# EAGLE board project (EAGLE 9.1.3)

Size 254.79 x 203.25 mm. Coordinates in mm from the lower left corner, seen from the top.
Outline: 154.79,0 254.79,0 254.79,80 154.79,80 154.79,0
Copper layers (1*16): Top 0.035mm / dielectric 1.5mm / Bottom 0.035mm
Design rules "default": minimum track width 6mil, minimum drill 0.35mm, track to track 6mil, track to pad 6mil, pad to pad 6mil, via to via 6mil, smd to smd 6mil, copper to edge 40mil, drill to drill 6mil, minimum pad ring 10mil, minimum via ring 8mil, stop-mask expansion 4mil, vias tented up to drill 0mil, thermal gap 10mil

## Footprints (pad centres in the part's own frame; a part is rotated, then mirrored left to right if it is on the bottom)
TP_3535 = smd 0.889 x 0.889: T 0,0
UNO_R3_SHIELD = drill 1.016 pad 1.88: 3.3V 24.13,-2.54; 5V 24.13,0; A0 24.13,12.7; A1 24.13,15.24; A2 24.13,17.78; A3 24.13,20.32; A4 24.13,22.86; A5 24.13,25.4; AREF -24.13,-13.97; D2 -24.13,20.32; D3 -24.13,17.78; D4 -24.13,15.24; D5 -24.13,12.7; D6 -24.13,10.16; D7 -24.13,7.62; D8 -24.13,3.81; D9 -24.13,1.27; D10 -24.13,-1.27; D11 -24.13,-3.81; D12 -24.13,-6.35; D13 -24.13,-8.89; GND@0 24.13,2.54; GND@1 24.13,5.08; GND@2 -24.13,-11.43; IOREF 24.13,-7.62; NC 24.13,-10.16; RES 24.13,-5.08; RX -24.13,25.4; SCL -24.13,-19.05; SDA -24.13,-16.51; TX -24.13,22.86; VIN 24.13,7.62
ARDUINO_R3 = drill 1.016 pad 1.93: 3.3V 2.54,-24.13; 5V 5.08,-24.13; A0 17.78,-24.13; A1 20.32,-24.13; A2 22.86,-24.13; A3 25.4,-24.13; A4 27.94,-24.13; A5 30.48,-24.13; AREF -9.144,24.13; D0 30.48,24.13; D1 27.94,24.13; D2 25.4,24.13; D3 22.86,24.13; D4 20.32,24.13; D5 17.78,24.13; D6 15.24,24.13; D7 12.7,24.13; D8 8.636,24.13; D9 6.096,24.13; D10 3.556,24.13; D11 1.016,24.13; D12 -1.524,24.13; D13 -4.064,24.13; GND@1 7.62,-24.13; GND@2 10.16,-24.13; GND@3 -6.604,24.13; GND@4 33.16,-1.32; IOREF -2.54,-24.13; MISO 30.62,3.76; MOSI 33.16,1.22; NC -5.08,-24.13; RESET@1 0,-24.13; RESET@2 30.62,-1.32; SCK 30.62,1.22; SCL -14.224,24.13; SDA -11.684,24.13; VCC 33.16,3.76; VIN 12.7,-24.13 | hole 3.175: -17.78,24.13; 33.02,8.89; 33.02,-19.05; -19.05,-24.13
0805 = smd 1.016 x 1.397: 1 -0.889,0; 2 0.889,0
0402 = smd 0.635 x 0.635: 1 -0.445,0; 2 0.445,0
AVX-A = smd 1.27 x 1.27: + -1.27,0; - 1.27,0
SOD123 = smd 1.397 x 1.397: + 1.651,0; - -1.651,0
TO92 = drill 0.813 pad 1.676 octagon: 1 -1.27,0; 2 0,1.905; 3 1.27,0
2.0_1X4DD = smd 0.965 x 2.54: 1 -3,0; 2 -1,0; 3 1,0; 4 3,0 | smd 1.55 x 2.184: SS1 -6.2,3.4; SS2 6.2,3.4
TSOP17_TB1 = drill 1 pad 1.676: GND 0,-3.81; VO 0,3.81; VS 0,-1.27
POWER_JACK_PTH = drill 2.997 pad 4.318: GND 0,7.7; GNDBREAK 4.7,10.7; PWR 0,13.7
USB-A-S-SILK-FEMALE = smd 3 x 0.9: D+ 7.212,-1; D- 7.212,1; GND 7.212,-3.5; VBUS 7.212,3.5 | drill 2.311: SHLD1 3,-6.566; SHLD2 3,6.566
USB-B-MICRO-SMD = smd 1.45 x 0.4: D+ 2.725,0; D- 2.725,0.65; GND 2.725,-1.3; ID 2.725,-0.65; VBUS 2.725,1.3 | smd 1.5 x 1.8: SHIELD1 0,3.685; SHIELD2 0,-3.685 | smd 1.5 x 2.5: SHIELD3 0,0 | hole 0.85: 2.2,1.9; 2.2,-1.9
PW-3P-2.5 = drill 0.813 pad 2.032 long: + 3.175,0; -1 -3.048,0; -2 0,-4.953
4P-2.54-15.6X12.2X13.2 = drill 1.016 pad 1.778 square: 1 -5.207,2.54 | drill 1.016 pad 1.778: 2 -1.651,-2.54; 3 1.651,2.54; 4 5.207,-2.54
1X04 = drill 1.016 pad 1.88: 1 0,0; 2 2.54,0; 3 5.08,0; 4 7.62,0
1X12 = drill 1.016 pad 1.88: 1 0,0; 2 2.54,0; 3 5.08,0; 4 7.62,0; 5 10.16,0; 6 12.7,0; 7 15.24,0; 8 17.78,0; 9 20.32,0; 10 22.86,0; 11 25.4,0; 12 27.94,0
2P-2.54-12.1X8.5X13.4 = drill 1.016 pad 1.778 square: 1 -1.651,-2.54 | drill 1.016 pad 1.778: 2 1.651,2.54
1X03 = drill 1.016 pad 1.88: 1 0,0; 2 2.54,0; 3 5.08,0
4P-2.54-90 = drill 0.889 pad 1.651 square: 1 0,3.81 | drill 0.889 pad 1.651: 2 0,1.27; 3 0,-1.27; 4 0,-3.81
LED5MM = drill 0.813 pad 1.676 octagon: A -1.27,0; K 1.27,0
SCREWTERMINAL-3.5MM-4 = drill 1.2 pad 2.032 square: 1 0,0 | drill 1.2 pad 2.032: 2 3.5,0; 3 7,0; 4 10.5,0
RASPBERRY-PI_REV2 = drill 1 square: P1_1 -41.91,21.59; P5_1 -36.83,19.05 | drill 1 pad 1.676: P1_2 -41.91,24.13; P1_6 -36.83,24.13 | drill 1: P1_3 -39.37,21.59; P1_4 -39.37,24.13; P1_5 -36.83,21.59; P1_7 -34.29,21.59; P1_8 -34.29,24.13; P1_9 -31.75,21.59; P1_10 -31.75,24.13; P1_11 -29.21,21.59; P1_12 -29.21,24.13; P1_13 -26.67,21.59; P1_14 -26.67,24.13; P1_15 -24.13,21.59; P1_16 -24.13,24.13; P1_17 -21.59,21.59; P1_18 -21.59,24.13; P1_19 -19.05,21.59; P1_20 -19.05,24.13; P1_21 -16.51,21.59; P1_22 -16.51,24.13; P1_23 -13.97,21.59; P1_24 -13.97,24.13; P1_25 -11.43,21.59; P1_26 -11.43,24.13; P5_2 -36.83,16.51; P5_3 -34.29,19.05; P5_4 -34.29,16.51; P5_5 -31.75,19.05; P5_6 -31.75,16.51; P5_7 -29.21,19.05; P5_8 -29.21,16.51 | hole 2.9: 35.69,14.365; -18.81,-11.135; -41.67,-26.375; 0.24,-26.375; 38.34,-26.375; 38.34,0.295; 38.34,24.425; -41.67,0.295
QFN-28 = smd 0.85 x 0.2: 1 -1.975,1.2; 2 -1.975,0.8; 3 -1.975,0.4; 4 -1.975,0; 5 -1.975,-0.4; 6 -1.975,-0.8; 7 -1.975,-1.2; 15 1.975,-1.2; 16 1.975,-0.8; 17 1.975,-0.4; 18 1.975,0; 19 1.975,0.4; 20 1.975,0.8; 21 1.975,1.2 | smd 0.2 x 0.85: 8 -1.2,-1.975; 9 -0.8,-1.975; 10 -0.4,-1.975; 11 0,-1.975; 12 0.4,-1.975; 13 0.8,-1.975; 14 1.2,-1.975; 22 1.2,1.975; 23 0.8,1.975; 24 0.4,1.975; 25 0,1.975; 26 -0.4,1.975; 27 -0.8,1.975; 28 -1.2,1.975 | smd 2.65 x 2.65: 29 0,0
USB-A-H = drill 0.914 pad 1.88: D+ 2.4,1.127; D- 2.4,-1.127; GND 2.4,3.5; VBUS 2.4,-3.5 | drill 2.2: SHLD1 0,-5.8; SHLD2 0,5.8 | hole 1.1: -0.1,2.25; -0.1,-2.25
TO252 = smd 1.016 x 2: 1 -2.3,-4.75; 3 2.3,-4.75 | smd 6.2 x 6.2: 2 0,1.75
TACTILE_SWITCH_PTH_6.0MM = drill 1.016 pad 1.88: 1 -3.251,2.261; 2 3.251,2.261; 3 -3.251,-2.261; 4 3.251,-2.261
SSOP16 = smd 0.406 x 1.27: 1 -2.223,-2.925; 2 -1.587,-2.925; 3 -0.953,-2.925; 4 -0.318,-2.925; 5 0.318,-2.925; 6 0.953,-2.925; 7 1.587,-2.925; 8 2.223,-2.925; 9 2.223,2.925; 10 1.587,2.925; 11 0.953,2.925; 12 0.318,2.925; 13 -0.318,2.925; 14 -0.953,2.925; 15 -1.587,2.925; 16 -2.223,2.925
1206-8 = smd 0.457 x 0.635: 1 -0.953,-0.762; 2 -0.318,-0.762; 3 0.318,-0.762; 4 0.953,-0.762; 5 0.953,0.762; 6 0.318,0.762; 7 -0.318,0.762; 8 -0.953,0.762
TO252' = smd 1.016 x 1.651: 1 -2.286,-4.826; 2 2.286,-4.826 | smd 5.4 x 6.2: 3 0,2.5

## Placement (x,y rotation side)
5V  DNP  [TP_3535]  60.81,229.87 0 top  (outside the outline)
B1  ARDUINO_UNO_R3_SHIELDBASIC  [UNO_R3_SHIELD]  -35.71,45.72 0 top  (outside the outline)
B2  ARDUINO_UNO_R3  [ARDUINO_R3]  -23.01,-29.21 0 top  (outside the outline)
C1  1uF  [0805]  -5.23,220.98 0 top  (outside the outline)
C2  100nF  [0402]  83.67,229.87 0 top  (outside the outline)
C4  16v_10uF  [AVX-A]  45.57,220.98 0 top  (outside the outline)
C5  10v_22uF  [AVX-A]  37.95,220.98 0 top  (outside the outline)
D1  ss0520  [SOD123]  -0.15,220.98 0 top  (outside the outline)
IC1  78L05Z  [TO92]  78.59,220.98 0 top  (outside the outline)
IC2  78L05Z  [TO92]  65.89,220.98 0 top  (outside the outline)
IC3  78L05Z  [TO92]  53.19,220.98 0 top  (outside the outline)
IN  TWIG_2.0-SMD-FEMALE'DD'  [2.0_1X4DD]  40.49,205.74 0 top
IR1  TSOP1730TB1  [TSOP17_TB1]  139.55,180.34 0 top
IR2  TSOP1730TB1  [TSOP17_TB1]  115.42,180.34 0 top
IR3  TSOP1730TB1  [TSOP17_TB1]  91.29,180.34 0 top
IR4  TSOP1730TB1  [TSOP17_TB1]  67.16,180.34 0 top
IR5  TSOP1730TB1  [TSOP17_TB1]  43.03,180.34 0 top
IR6  TSOP1730TB1  [TSOP17_TB1]  18.9,180.34 0 top
IR7  TSOP1730TB1  [TSOP17_TB1]  139.55,196.85 0 top
IR8  TSOP1730TB1  [TSOP17_TB1]  115.42,196.85 0 top
IR9  TSOP1730TB1  [TSOP17_TB1]  91.29,196.85 0 top
IR10  TSOP1730TB1  [TSOP17_TB1]  67.16,196.85 0 top
J1  POWER_JACK  [POWER_JACK_PTH]  59.54,116.84 0 top
J2  USB_A_1  [USB-A-S-SILK-FEMALE]  20.17,124.46 0 top
J3  USB_A_2  [USB-A-S-SILK-FEMALE]  3.66,124.46 0 top
J4  Power  [USB-B-MICRO-SMD]  101.45,209.55 0 top
J5  DNP  [PW-3P-2.5]  87.48,209.55 0 top
J6  4 Terminal  [4P-2.54-15.6X12.2X13.2]  120.5,210.82 0 top  (outside the outline)
J7  POWER_JACK  [POWER_JACK_PTH]  46.84,116.84 0 top
J8  POWER_JACK  [POWER_JACK_PTH]  34.14,116.84 0 top
J10  [1X04]  96.37,229.87 0 top  (outside the outline)
J13  [1X12]  107.8,229.87 0 top  (outside the outline)
J14  2-Terminal  [2P-2.54-12.1X8.5X13.4]  109.07,210.82 0 top  (outside the outline)
J15  [1X03]  87.48,229.87 0 top  (outside the outline)
J16  DNP  [4P-2.54-90]  51.92,209.55 0 top
LED1  [LED5MM]  92.56,222.25 0 top  (outside the outline)
MOTOR_A  [SCREWTERMINAL-3.5MM-4]  119.23,222.25 0 top  (outside the outline)
MOTOR_B  [SCREWTERMINAL-3.5MM-4]  103.99,222.25 0 top  (outside the outline)
OUT  TWIG_2.0-SMD-FEMALE'DD'  [2.0_1X4DD]  25.25,205.74 0 top
P1  RASPBERRY-PI  [RASPBERRY-PI_REV2]  100.18,29.21 0 top
P4  SX1509  [QFN-28]  13.82,208.28 0 top  (outside the outline)
P5  Slipring  [1X12]  4.93,220.98 0 top  (outside the outline)
P9  WIFI  [USB-A-H]  41.76,194.31 0 top
Q4  P3055LDG  [TO252]  17.63,193.04 0 top
Q5  P3055LDG  [TO252]  4.93,193.04 0 top
Q6  P3055LDG  [TO252]  135.74,209.55 0 top
R1  3.3k  [0402]  79.86,229.87 0 top  (outside the outline)
R2  3.3k  [0402]  76.05,229.87 0 top  (outside the outline)
R3  3.3k  [0402]  72.24,229.87 0 top  (outside the outline)
R4  3.3k  [0402]  68.43,229.87 0 top  (outside the outline)
R8  3.3k  [0402]  64.62,229.87 0 top  (outside the outline)
S1  Sleep/Wake  [TACTILE_SWITCH_PTH_6.0MM]  137.01,223.52 0 top  (outside the outline)
U2  P9813  [SSOP16]  4.93,208.28 0 top
U3  si5904  [1206-8]  139.55,231.14 0 top  (outside the outline)
U5  78M05  [TO252']  69.7,209.55 0 top

## Library data of the parts
5V C1 C2 C4 C5 D1 Q4-Q6 R1-R4 R8 U3 = Discrete
B1 B2 = SparkFun-Boards
IC1-IC3 LED1 = adafruit
IN J5 J6 J14 J16 OUT = Connector
IR1-IR10 = telefunken; OC_FARNELL: unknown; OC_NEWARK: unknown
J1 J7 J8 = SparkFun-Connectors; PROD_ID: CONN-08197
J2 J3 = SparkFun-Connectors; PROD_ID: CONN-09520; SF_ID: PRT-09011
J4 = SparkFun-Connectors; PROD_ID: CONN-11752
J10 = SparkFun-Connectors; PROD_ID: CONN-09696
J13 J15 P5 = SparkFun-Connectors
MOTOR_A MOTOR_B = SparkFun-Connectors; PROD_ID: 2xCONN-08399; SF_ID: 2xPRT-08084
P1 = RaspberryPi
P4 = SparkFun-IC-Special-Function; PROD_ID: IC-11311
P9 = SparkFun-Connectors; PROD_ID: CONN-08367; SF_ID: PRT-00437
S1 = SparkFun-Switches; PROD_ID: SWCH-08441; SF_SKU: COM-00097
U2 U5 = IC

## Nets
3.3V: B1.3.3V B2.3.3V IC2.1 IR1.VS IR2.VS IR3.VS IR4.VS IR5.VS IR6.VS IR7.VS IR8.VS IR9.VS IR10.VS P4.4 P4.12 P4.18
5V: 5V.T B1.5V B2.5V C1.2 C5.+ IC1.1 IC2.3 IC3.1 J4.VBUS J10.4 P1.P1_2 R2.1 R3.1 R8.1 U2.10 U3.5 U3.6 U3.7 U3.8 U5.2
12V_A: IC1.3 IC3.3 J1.PWR J8.PWR J13.2 P5.2
12V_B: J7.PWR J13.4 P5.4
!RESET!@2: B2.RESET@2
*D9: B1.D9
/RESET: B1.RES B2.RESET@1
??: LED1.A S1.1
A0: B1.A0 B2.A0
A1: B1.A1 B2.A1
A2: B1.A2 B2.A2
A3: B1.A3 B2.A3
A4: B1.A4 B2.A4
A5: B1.A5
AREF: B1.AREF B2.AREF
CHB: Q4.1 R8.2 U2.8
CHG: Q6.1 R3.2 U2.7
CHR: Q5.1 R2.2 U2.6
CIN: R1.2 U2.3 U3.3
COUT: OUT.1 U2.14
D0: B2.D0
D1: B2.D1
D2: B1.D2 B2.D2
D3: B1.D3 B2.D3
D4: B1.D4 B2.D4
D5: B1.D5 B2.D5
D6: B1.D6 B2.D6
D7: B1.D7 B2.D7
D8: B1.D8 B2.D8
D9: B2.D9
D10: B2.D10
D11: B2.D11
D13: B2.D13
DIN: R4.2 U2.2 U3.1
DOUT: OUT.2 U2.15
DRIVE_B: J6.2 J16.3 Q4.2
DRIVE_G: J6.4 J16.1 Q6.2
DRIVE_R: J6.3 J16.2 Q5.2
GND: B1.GND@0 B1.GND@1 B1.GND@2 B2.GND@1 B2.GND@2 B2.GND@3 B2.GND@4 C1.1 C2.2 C4.- C5.- IC1.2 IC2.2 IC3.2 IN.4 IN.SS1 IN.SS2 IR1.GND IR2.GND IR3.GND IR4.GND IR5.GND IR6.GND IR7.GND IR8.GND IR9.GND IR10.GND J1.GND J2.GND J3.GND J4.GND J5.-1 J5.-2 J7.GND J8.GND J10.1 J13.1 J13.3 J14.2 J15.3 LED1.K OUT.4 OUT.SS1 OUT.SS2 P1.P1_6 P4.3 P4.17 P4.29 P5.1 P5.3 P9.GND Q4.3 Q5.3 Q6.3 R1.1 R4.1 S1.3 U2.5 U2.9 U2.13 U5.3
IOREF: B1.IOREF B2.IOREF
IR1: IR1.VO IR5.VO P4.2 P4.8
IR2: IR2.VO IR6.VO P4.5 P4.13
IR3: IR3.VO IR7.VO IR9.VO P4.6 P4.14 P4.16
IR4: IR4.VO IR8.VO IR10.VO P4.7 P4.15 P4.19
MISO: B2.MISO
MOSI: B2.MOSI
MOTOR_A_1: MOTOR_A.1
MOTOR_A_2: MOTOR_A.2
MOTOR_A_3: MOTOR_A.3
MOTOR_A_4: MOTOR_A.4
MOTOR_B_1: J13.8 MOTOR_B.1 P5.8
MOTOR_B_2: J13.9 MOTOR_B.2 P5.9
MOTOR_B_3: J13.10 MOTOR_B.3 P5.10
MOTOR_B_4: J13.11 MOTOR_B.4 P5.11
N$1: J2.SHLD1 J2.SHLD2 P9.SHLD1 P9.SHLD2
N$11: C2.1 U2.11
N$12: C4.+ D1.- U5.1
RX: B1.RX
RXDATA: B2.D12 J10.2 P4.1
SCIN: IN.1 J13.5 J15.1 P4.28 P5.5 U3.4
SCK: B2.SCK
SCL: B1.SCL B2.SCL P1.P1_5 P4.25
SDA: B1.SDA B2.SDA P1.P1_3 P4.24
SDIN: IN.2 J13.6 J15.2 P4.27 P5.6 U3.2
TX: B1.TX
VBUS: J2.VBUS J3.VBUS P9.VBUS
VCC: B2.VCC
VDRIVE: D1.+ J5.+ J6.1 J14.1 J16.4
VIN: B1.VIN B2.VIN
WAKE_LED: J13.7 P4.9 P5.7
WAKE_SW: J13.12 P5.12

## Tracks (layer width: path | path; a pad name or v marks a point on that pad's centre or on a via)
3.3V  (15 unrouted)
5V  (19 unrouted)
12V_A  (5 unrouted)
12V_B  (2 unrouted)
/RESET  (1 unrouted)
??  (1 unrouted)
A0  (1 unrouted)
A1  (1 unrouted)
A2  (1 unrouted)
A3  (1 unrouted)
A4  (1 unrouted)
AREF  (1 unrouted)
CHB  (2 unrouted)
CHG  (2 unrouted)
CHR  (2 unrouted)
CIN  (2 unrouted)
COUT  (1 unrouted)
D2  (1 unrouted)
D3  (1 unrouted)
D4  (1 unrouted)
D5  (1 unrouted)
D6  (1 unrouted)
D7  (1 unrouted)
D8  (1 unrouted)
DIN  (2 unrouted)
DOUT  (1 unrouted)
DRIVE_B  (2 unrouted)
DRIVE_G  (2 unrouted)
DRIVE_R  (2 unrouted)
GND  (60 unrouted)
IOREF  (1 unrouted)
IR1  (3 unrouted)
IR2  (3 unrouted)
IR3  (5 unrouted)
IR4  (5 unrouted)
MOTOR_B_1  (2 unrouted)
MOTOR_B_2  (2 unrouted)
MOTOR_B_3  (2 unrouted)
MOTOR_B_4  (2 unrouted)
N$1  (3 unrouted)
N$11  (1 unrouted)
N$12  (2 unrouted)
RXDATA  (2 unrouted)
SCIN  (5 unrouted)
SCL  (3 unrouted)
SDA  (3 unrouted)
SDIN  (5 unrouted)
VBUS  (2 unrouted)
VDRIVE  (4 unrouted)
VIN  (1 unrouted)
WAKE_LED  (2 unrouted)
WAKE_SW  (1 unrouted)